# Altium PCB RGB_Matrix.PcbDoc
Units mm, origin at the board's own origin, x right, y up, seen from the top; angles counter-clockwise.
Board outline 66.5 x 59.5 mm, 2 copper layers (Top Layer, Bottom Layer); 83 components, 50 nets, 482 pads, 123 vias.
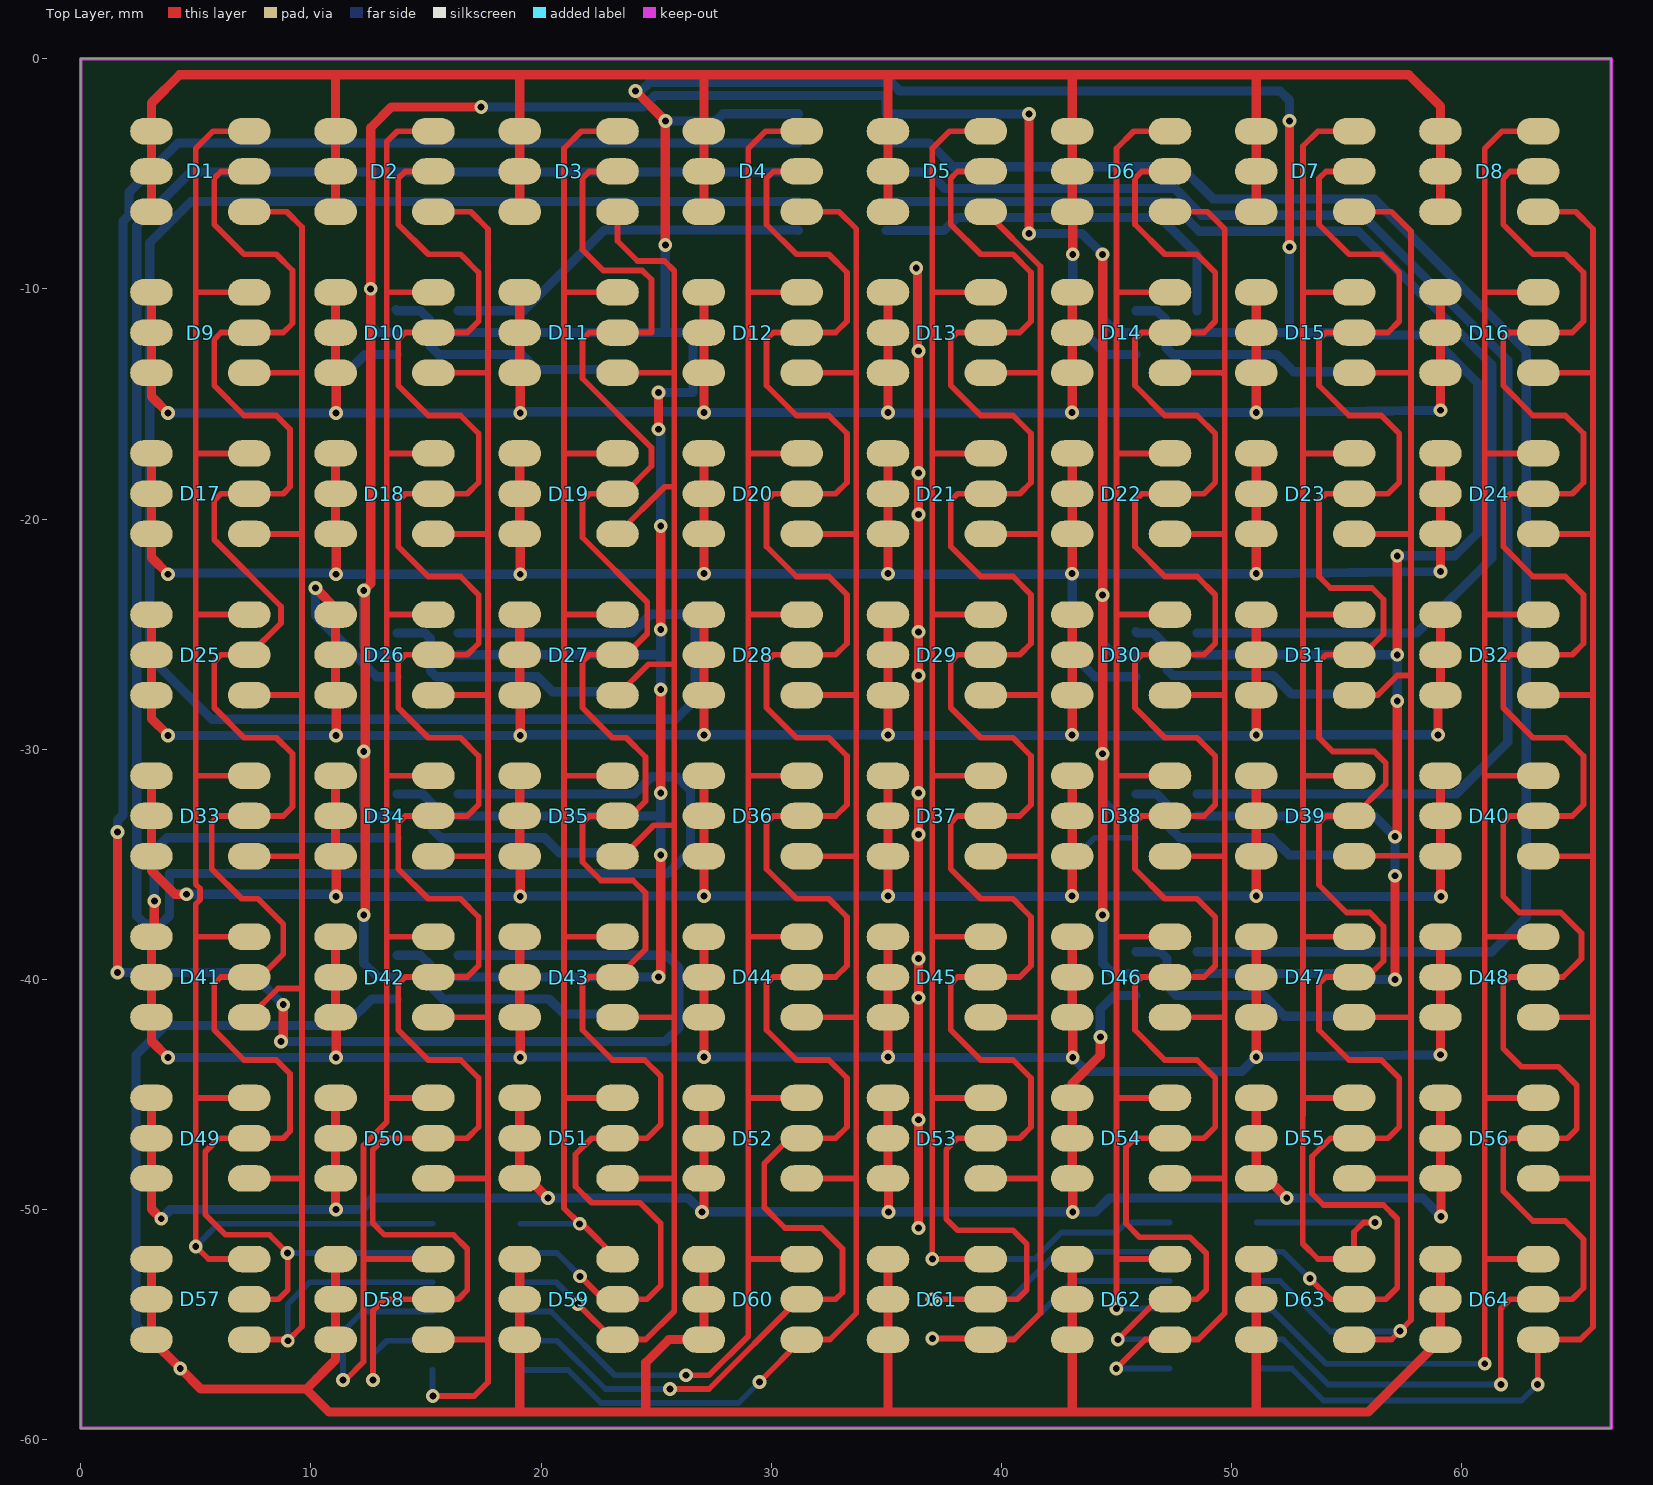
[diagram p0: Top Layer view]
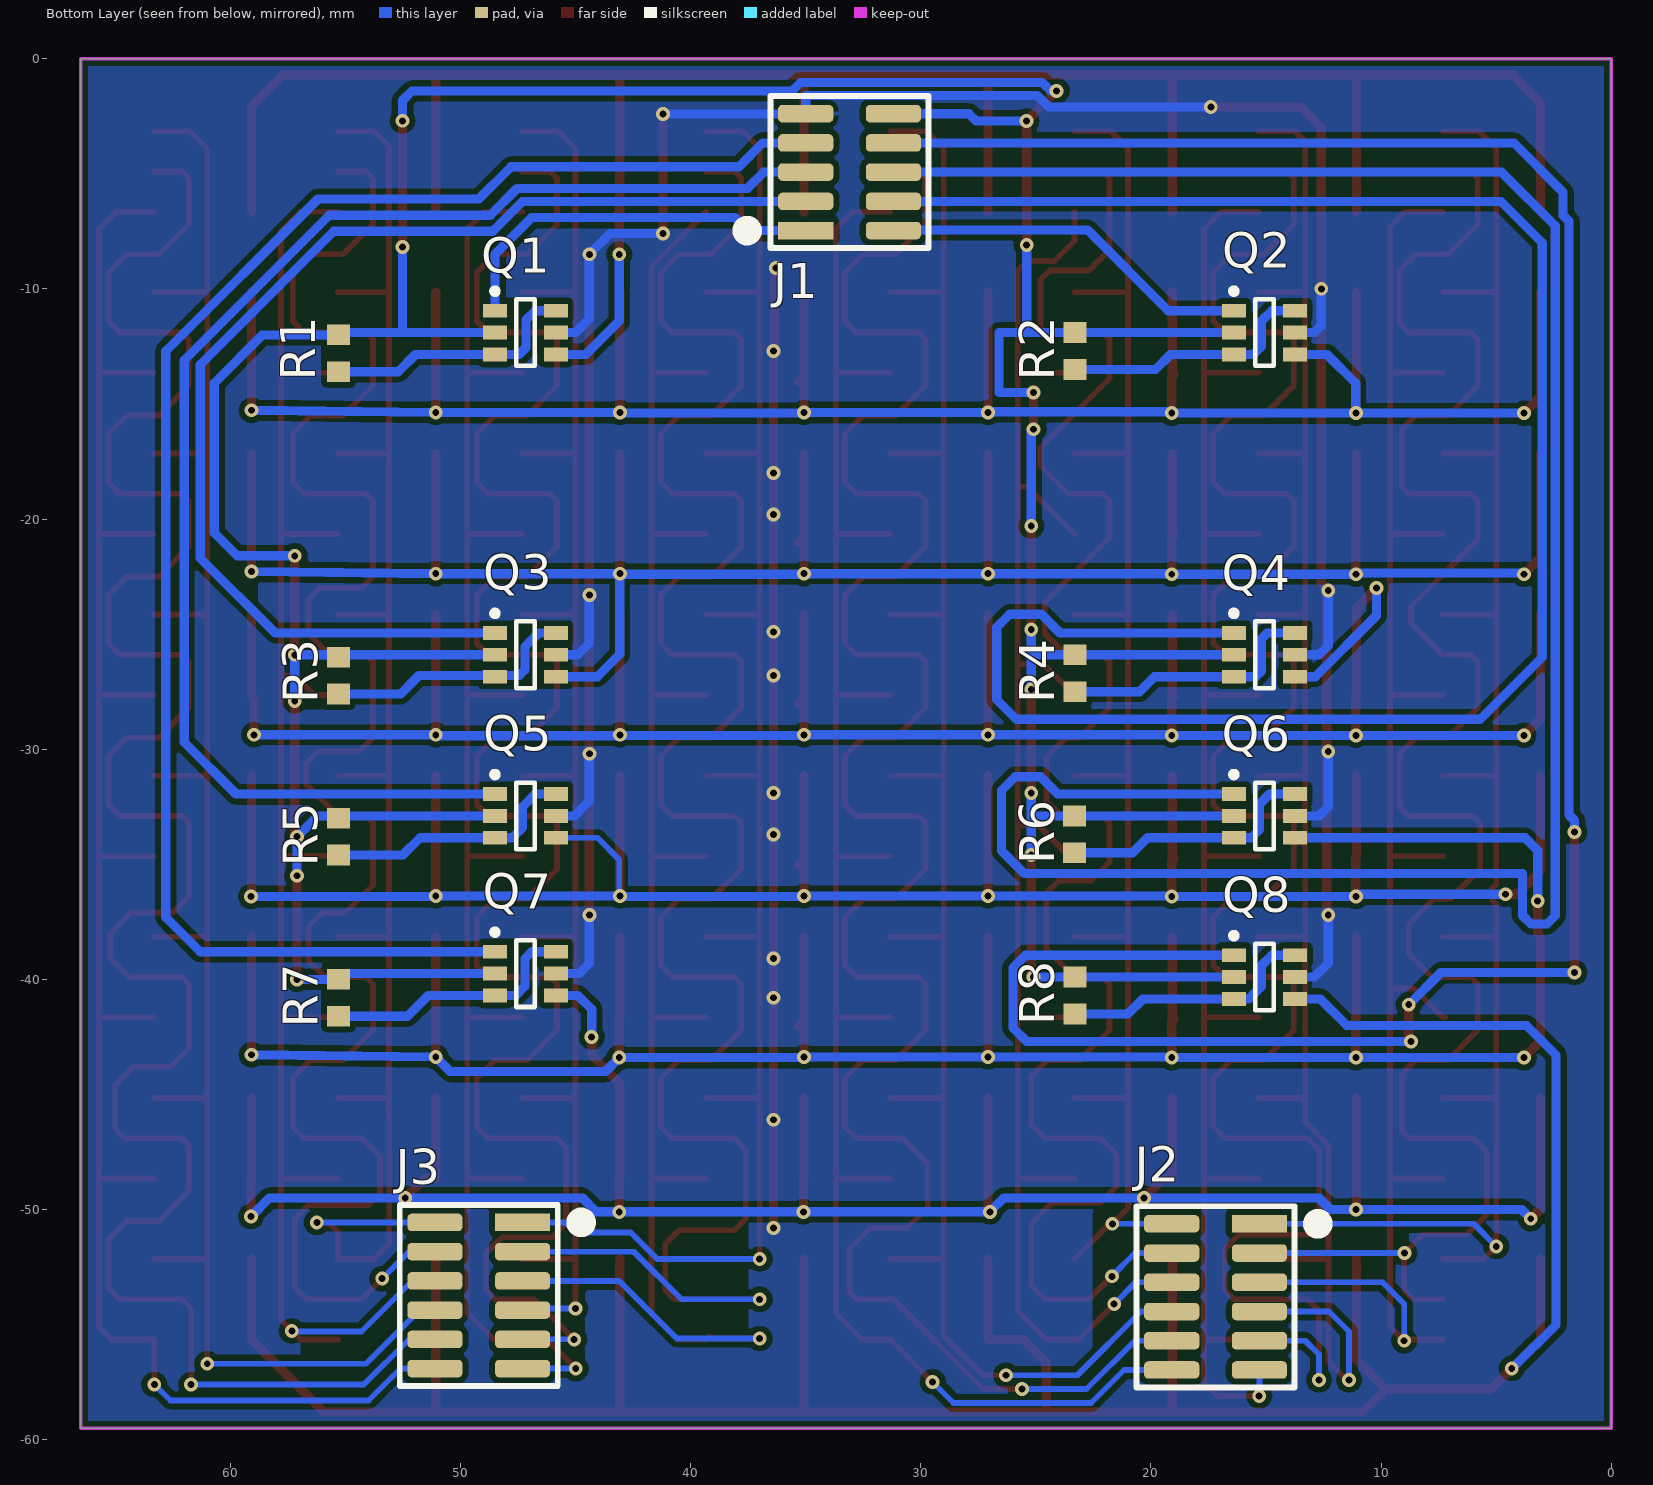
[diagram p1: Bottom Layer view, seen from below]
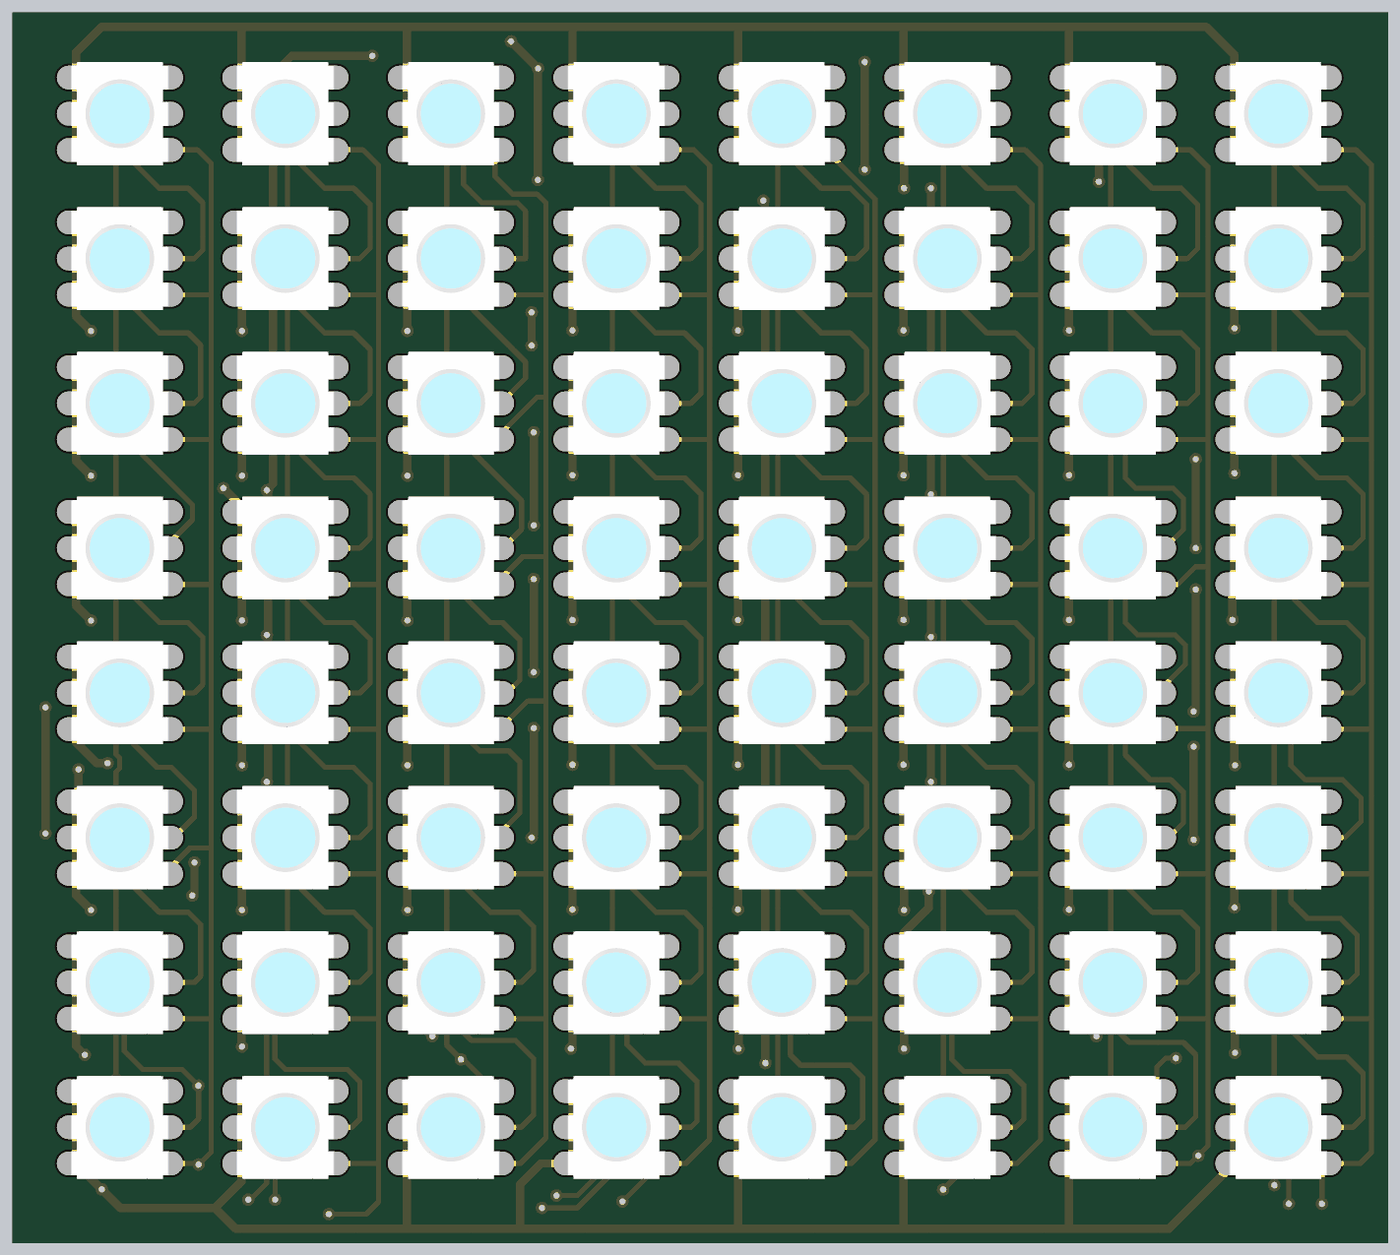
[diagram p2: 3D render of the assembled board from above, using the file's embedded part models]

## Layer stack, top to bottom
Top Solder: solder mask 0.0102, Solder Resist, Dk 3.5
Top Layer: signal copper 0.0356
Dielectric 1: dielectric 0.32, FR-4, Dk 4.8
Bottom Layer: signal copper 0.0356
Bottom Solder: solder mask 0.0102, Solder Resist, Dk 3.5

## Board outline
0,-59.5 66.5,-59.5 66.5,0 0,0

## Design rules (kind name [scope] priority, off if disabled: settings)
Clearance [All] p1: gap=0.16 ignorepadtopadclearanceinfootprint=FALSE except(0: Arc-Text Arc-Hole Track-Text Track-Hole SMDPad-Text SMDPad-Hole THPad-Text THPad-Hole Via-Text Via-Hole Fill-Text Fill-Hole Poly-Text Poly-Hole Region-Text Region-Hole Text-Text Text-Hole; 0.25: Arc-Poly Track-Poly SMDPad-Poly THPad-Poly Via-Poly Fill-Poly Poly-Poly)
Height [All] p1: minheight=0 maxheight=200 prefheight=12.7
HoleSize [All] p1: absolutevalues=TRUE maxlimit=6.35 minlimit=0.3 maxpercent=80.000 minpercent=20.000
MinimumSolderMaskSliver [All] p1: minsoldermaskwidth=0.1
PlaneClearance [All] p1: clearance=1
PlaneConnect [All] p1: planeconnectstyle=Relief reliefexpansion=0.508 reliefentries=4 reliefconductorwidth=1 reliefairgap=0.254
PolygonConnect PolygonConnect_1 [IsVia] p1: connectstyle=Direct reliefconductorwidth=0.254 reliefentries=4 polygonreliefangle="90 Angle" airgapwidth=0.254
PolygonConnect [All] p2: connectstyle=Relief reliefconductorwidth=0.2 reliefentries=4 polygonreliefangle="90 Angle" airgapwidth=0.2
RoutingVias [All] p1: holewidth=0.3 width=0.6 viastyle="Through Hole" minholewidth=0.3 minwidth=0.6 maxholewidth=6.35 maxwidth=10
SilkToSolderMaskClearance [IsPad] p1: minsilkscreentomaskgap=0.178 clearancetoexposedcopper=TRUE
SolderMaskExpansion [All] p1: expansion=0.102
Width [All] p1: maxlimit=10 minlimit=0.16 preferedwidth=0.4
24 further rules are at their usual default settings.

## Components (designator, comment, footprint, x,y, rotation, side; value= is the part's Value field where it differs from the comment)
D1 "LED_RGB" LED5050_RGB_N 5.2,-4.9 r0 top
D2 "LED_RGB" LED5050_RGB_N 13.2,-4.9 r0 top
D3 "LED_RGB" LED5050_RGB_N 21.2,-4.9 r0 top
D4 "LED_RGB" LED5050_RGB_N 29.2,-4.9 r0 top
D5 "LED_RGB" LED5050_RGB_N 37.2,-4.9 r0 top
D6 "LED_RGB" LED5050_RGB_N 45.2,-4.9 r0 top
D7 "LED_RGB" LED5050_RGB_N 53.2,-4.9 r0 top
D8 "LED_RGB" LED5050_RGB_N 61.2,-4.9 r0 top
D9 "LED_RGB" LED5050_RGB_N 5.2,-11.9 r0 top
D10 "LED_RGB" LED5050_RGB_N 13.2,-11.9 r0 top
D11 "LED_RGB" LED5050_RGB_N 21.2,-11.9 r0 top
D12 "LED_RGB" LED5050_RGB_N 29.2,-11.9 r0 top
D13 "LED_RGB" LED5050_RGB_N 37.2,-11.9 r0 top
D14 "LED_RGB" LED5050_RGB_N 45.2,-11.9 r0 top
D15 "LED_RGB" LED5050_RGB_N 53.2,-11.9 r0 top
D16 "LED_RGB" LED5050_RGB_N 61.2,-11.9 r0 top
D17 "LED_RGB" LED5050_RGB_N 5.2,-18.9 r0 top
D18 "LED_RGB" LED5050_RGB_N 13.2,-18.9 r0 top
D19 "LED_RGB" LED5050_RGB_N 21.2,-18.9 r0 top
D20 "LED_RGB" LED5050_RGB_N 29.2,-18.9 r0 top
D21 "LED_RGB" LED5050_RGB_N 37.2,-18.9 r0 top
D22 "LED_RGB" LED5050_RGB_N 45.2,-18.9 r0 top
D23 "LED_RGB" LED5050_RGB_N 53.2,-18.9 r0 top
D24 "LED_RGB" LED5050_RGB_N 61.2,-18.9 r0 top
D25 "LED_RGB" LED5050_RGB_N 5.2,-25.9 r0 top
D26 "LED_RGB" LED5050_RGB_N 13.2,-25.9 r0 top
D27 "LED_RGB" LED5050_RGB_N 21.2,-25.9 r0 top
D28 "LED_RGB" LED5050_RGB_N 29.2,-25.9 r0 top
D29 "LED_RGB" LED5050_RGB_N 37.2,-25.9 r0 top
D30 "LED_RGB" LED5050_RGB_N 45.2,-25.9 r0 top
D31 "LED_RGB" LED5050_RGB_N 53.2,-25.9 r0 top
D32 "LED_RGB" LED5050_RGB_N 61.2,-25.9 r0 top
D33 "LED_RGB" LED5050_RGB_N 5.2,-32.9 r0 top
D34 "LED_RGB" LED5050_RGB_N 13.2,-32.9 r0 top
D35 "LED_RGB" LED5050_RGB_N 21.2,-32.9 r0 top
D36 "LED_RGB" LED5050_RGB_N 29.2,-32.9 r0 top
D37 "LED_RGB" LED5050_RGB_N 37.2,-32.9 r0 top
D38 "LED_RGB" LED5050_RGB_N 45.2,-32.9 r0 top
D39 "LED_RGB" LED5050_RGB_N 53.2,-32.9 r0 top
D40 "LED_RGB" LED5050_RGB_N 61.2,-32.9 r0 top
D41 "LED_RGB" LED5050_RGB_N 5.2,-39.9 r0 top
D42 "LED_RGB" LED5050_RGB_N 13.2,-39.9 r0 top
D43 "LED_RGB" LED5050_RGB_N 21.2,-39.9 r0 top
D44 "LED_RGB" LED5050_RGB_N 29.2,-39.9 r0 top
D45 "LED_RGB" LED5050_RGB_N 37.2,-39.9 r0 top
D46 "LED_RGB" LED5050_RGB_N 45.2,-39.9 r0 top
D47 "LED_RGB" LED5050_RGB_N 53.2,-39.9 r0 top
D48 "LED_RGB" LED5050_RGB_N 61.2,-39.9 r0 top
D49 "LED_RGB" LED5050_RGB_N 5.2,-46.9 r0 top
D50 "LED_RGB" LED5050_RGB_N 13.2,-46.9 r0 top
D51 "LED_RGB" LED5050_RGB_N 21.2,-46.9 r0 top
D52 "LED_RGB" LED5050_RGB_N 29.2,-46.9 r0 top
D53 "LED_RGB" LED5050_RGB_N 37.2,-46.9 r0 top
D54 "LED_RGB" LED5050_RGB_N 45.2,-46.9 r0 top
D55 "LED_RGB" LED5050_RGB_N 53.2,-46.9 r0 top
D56 "LED_RGB" LED5050_RGB_N 61.2,-46.9 r0 top
D57 "LED_RGB" LED5050_RGB_N 5.2,-53.9 r0 top
D58 "LED_RGB" LED5050_RGB_N 13.2,-53.9 r0 top
D59 "LED_RGB" LED5050_RGB_N 21.2,-53.9 r0 top
D60 "LED_RGB" LED5050_RGB_N 29.2,-53.9 r0 top
D61 "LED_RGB" LED5050_RGB_N 37.2,-53.9 r0 top
D62 "LED_RGB" LED5050_RGB_N 45.2,-53.9 r0 top
D63 "LED_RGB" LED5050_RGB_N 53.2,-53.9 r0 top
D64 "LED_RGB" LED5050_RGB_N 61.2,-53.9 r0 top
J1 "2x5 SMD HEADER" "2x5 SMD HEADER" 35,-7.47 r180 bottom
J2 "2x6 SMD HEADER" "2x6 SMD HEADER" 15.29,-50.62 r0 bottom locked
J3 "2x6 SMD HEADER" "2x6 SMD HEADER" 47.3,-50.56 r0 bottom locked
Q1 "QS6M3TR" QS6M3TR 47.175,-11.9 r180 bottom
Q2 "QS6M3TR" QS6M3TR 15.075,-11.9 r180 bottom
Q3 "QS6M3TR" QS6M3TR 47.175,-25.9 r180 bottom
Q4 "QS6M3TR" QS6M3TR 15.075,-25.9 r180 bottom
Q5 "QS6M3TR" QS6M3TR 47.175,-32.9 r180 bottom
Q6 "QS6M3TR" QS6M3TR 15.075,-32.9 r180 bottom
Q7 "QS6M3TR" QS6M3TR 47.175,-39.75 r180 bottom
Q8 "QS6M3TR" QS6M3TR 15.075,-39.9 r180 bottom
R1 "10k" RESC0603(1608)_N 55.3,-12.8 r90 bottom
R2 "10k" RESC0603(1608)_N 23.3,-12.7 r90 bottom
R3 "10k" RESC0603(1608)_N 55.3,-26.8 r90 bottom
R4 "10k" RESC0603(1608)_N 23.3,-26.7 r90 bottom
R5 "10k" RESC0603(1608)_N 55.3,-33.8 r90 bottom
R6 "10k" RESC0603(1608)_N 23.325,-33.7 r90 bottom
R7 "10k" RESC0603(1608)_N 55.3,-40.8 r90 bottom
R8 "10k" RESC0603(1608)_N 23.3,-40.7 r90 bottom

## Footprints (in the part's own frame and the unit in brackets; to place one, negate y for a bottom-side part, rotate by r counter-clockwise, add the part's x,y. Pads: shape width x height; smd on the part's side, far side on the other; paste and mask are expansions set on the pad)
"2x5 SMD HEADER" [mm]
  rect 2.4x0.76 smd: 1(0,0)
  rrect50% 2.4x0.76 smd: 2(3.81,0) 3(0,1.27) 4(3.81,1.27) 5(0,2.54) 6(3.81,2.54) 7(0,3.81) 8(3.81,3.81) 9(0,5.08) 10(3.81,5.08)
  silkscreen extent -2.68,-0.76 5.33,5.84
"2x6 SMD HEADER" [mm]
  rect 2.4x0.76 smd: 1(0,0)
  rrect50% 2.4x0.76 smd: 2(3.81,0) 3(0,1.27) 4(3.81,1.27) 5(0,2.54) 6(3.81,2.54) 7(0,3.81) 8(3.81,3.81) 9(0,5.08) 10(3.81,5.08) 11(0,6.35) 12(3.81,6.35)
  silkscreen extent -2.68,-0.76 5.33,7.11
LED5050_RGB_N [mm] "RGB LED SMD 5050, individual color channels, normal density"
  oval 1.85x1.15 smd: 1(-2.125,1.75) 2(-2.125,0) 3(-2.125,-1.75) 4(2.125,-1.75) 5(2.125,0) 6(2.125,1.75)
  body extent -2.37,-2.49 2.36,2.49, height 2.07
QS6M3TR [mm] "SOT23, 6-Leads, Body 2.90x2.80mm, Pitch 0.95mm, IPC Medium Density"
  rect 1.05x0.6 smd: 1(-1.325,0.95) 2(-1.325,0) 3(-1.325,-0.95) 4(1.325,-0.95) 5(1.325,0) 6(1.325,0.95)
  silkscreen extent -1.45,-1.45 0.4,1.92, body extent -1.4,-1.45 1.4,1.45, height 1
RESC0603(1608)_N [mm] "Chip Resistor, Body 1.6x0.8mm, IPC Medium Density"
  rect 0.9x1 smd: 1(-0.8,0) 2(0.8,0)
  body extent -0.85,-0.47 0.85,0.47, height 0.6

## Part data
D1 D2 D3 D4 D5 D6 D7 D8 D9 D10 D11 D12 D13 D14 D15 D16 D17 D18 D19 D20 D21 D22 D23 D24 D25 D26 D27 D28 D29 D30 D31 D32 D33 D34 D35 D36 D37 D38 D39 D40 D41 D42 D43 D44 D45 D46 D47 D48 D49 D50 D51 D52 D53 D54 D55 D56 D57 D58 D59 D60 D61 D62 D63 D64: library part 3348, "LED RGB, independent colors", antall=300, beskrivelse=SMD, dybde=0, hylle=6, id=3348, kolonne=0, lager_type=Fremlager, navn="LED RGB", pakke_opprettet="12/17/2015 2:22:54 AM", pakke_opprettet_av=924, pakketype=SMD, pris=1, rad=7, rom=OV, symbol_opprettet="12/17/2015 2:22:13 AM", symbol_opprettet_av=924
R1 R2 R3 R4 R5 R6 R7 R8: library part 2444, "0.1W 1% Thick film resistor", antall=90, dybde=72, hylle=6, id=2444, kolonne=0, lager_type=Fremlager, leverandor=Farnell, leverandor_varenr=2447230, navn=10k, nokkelord="Resistor Motstand", pakke_opprettet="08-Jul-14 9:15:30 PM", pakke_opprettet_av=815, pakketype=0603, pris=0, produsent=Multikomp, rad=-1, rom=OV, symbol_opprettet="08-Jul-14 9:16:33 PM", symbol_opprettet_av=815

## Via types
v1: diameter 0.6, hole 0.3, Top Layer to Bottom Layer, tented both sides, 123 vias

## Nets (pads, with @x,y where several pads share a name; then routed paths per layer and width w, separated by ;. In a path a pad name is that pad's centre, name@x,y a point inside that pad or via, vN(x,y) a via of type N, cw(c..) or ccw(c..) an arc to the next point about the centre after c; other vN are vias at no path point)
GND: J1.9 Q1.5 Q2.5 Q3.5 Q4.5 Q5.5 Q6.5 Q7.5 Q8.5 | length 174
  Top Layer w0.4: v1(12.3,-37.2) 12.36,-37.14 12.36,-30.16 v1(12.3,-30.1) 12.36,-30.04 12.36,-23.16 v1(12.3,-23.1) 12.6,-22.8 v1(12.6,-10) 12.6,-3 13.5,-2.1 v1(17.4,-2.1) ; v1(36.3,-9.1) 36.36,-9.1 36.36,-12.7 v1(36.4,-12.7) v1(36.4,-18) v1(36.4,-19.8) v1(36.4,-24.9) v1(36.4,-26.8) v1(36.4,-31.9) v1(36.4,-33.7) v1(36.4,-39.1) v1(36.4,-40.8) v1(36.4,-46.1) v1(36.4,-50.8) ; v1(41.2,-7.6) v1(41.2,-2.4) ; v1(44.4,-37.2) v1(44.4,-30.2) v1(44.4,-23.3) v1(44.4,-8.5)
  Bottom Layer w0.4: v1(12.3,-37.2) 12.3,-39.3 12.9,-39.9 Q8.5 ; v1(12.3,-30.1) 12.3,-32.5 12.7,-32.9 Q6.5 ; v1(12.3,-23.1) 12.3,-25.5 12.7,-25.9 Q4.5 ; v1(12.6,-10) 12.6,-11.6 12.9,-11.9 Q2.5 ; v1(17.4,-2.1) 24.447,-2.1 24.947,-1.6 35,-1.6 J1.9 35.01,-2.4 v1(41.2,-2.4) ; v1(41.2,-7.6) 43.5,-7.6 v1(44.4,-8.5) 44.4,-11.3 45,-11.9 Q1.5 ; v1(44.4,-37.2) 44.4,-39.3 44.85,-39.75 Q7.5 ; 44.4,-32.25 45.05,-32.9 Q5.5 ; 44.4,-32.1 v1(44.4,-30.2) ; v1(44.4,-23.3) 44.4,-25.4 44.9,-25.9 Q3.5
LEDS.BLUE_1: D1.4 D9.4 D17.4 D25.4 D33.4 D41.4 D49.4 D57.4 J2.5 | length 77.4
  Top Layer w0.25: D41.4@7.225,-41.65 D41.4 8.575,-40.4 9.615,-40.4 ; D57.4 8.85,-55.65 9,-55.8 v1(9,-55.7) 9.615,-55.085 9.615,-48.7 ; D49.4 9.565,-48.65 9.615,-48.7 ; D33.4 9.565,-34.65 9.615,-34.6 ; D17.4 8.95,-20.65 9.565,-20.65 9.615,-20.6 ; D9.4 9.565,-13.65 9.615,-13.7 ; D1.4 8.95,-6.65 9.615,-7.315 9.615,-13.7 ; 8.95,-27.65 D25.4 8.95,-27.65 ; 8.95,-27.65 9.565,-27.65 9.615,-27.6 ; 9.615,-48.7 9.615,-40.4 ; 9.615,-40.4 9.615,-34.6 ; 9.615,-34.6 9.615,-27.6 ; 9.615,-27.6 9.615,-20.6 ; 9.615,-20.6 9.615,-13.7
  Bottom Layer w0.25: v1(9,-55.7) 9,-54.1 9.94,-53.16 J2.5
LEDS.BLUE_2: D2.4 D10.4 D18.4 D26.4 D34.4 D42.4 D50.4 D58.4 J2.11 | length 78.2
  Top Layer w0.25: v1(15.3,-58.1) 17.1,-58.1 17.7,-57.5 17.7,-55.7 ; D58.4 17.65,-55.65 17.7,-55.7 ; D50.4 17.65,-48.65 17.7,-48.7 ; D34.4 17.65,-34.65 17.7,-34.7 ; D18.4 17.65,-20.65 17.7,-20.7 ; D2.4 16.95,-6.65 17.7,-7.4 17.7,-13.7 ; 16.95,-41.65 D42.4 16.95,-41.65 ; 16.95,-41.65 17.65,-41.65 17.7,-41.7 ; 16.95,-27.65 17.65,-27.65 17.7,-27.7 ; 16.95,-27.65 D26.4 16.95,-27.65 ; 16.95,-13.65 D10.4 16.95,-13.65 ; 16.95,-13.65 17.65,-13.65 17.7,-13.7 ; 17.7,-55.7 17.7,-48.7 ; 17.7,-48.7 17.7,-41.7 ; 17.7,-41.7 17.7,-34.7 ; 17.7,-34.7 17.7,-27.7 ; 17.7,-27.7 17.7,-20.7 ; 17.7,-20.7 17.7,-13.7
  Bottom Layer w0.25: J2.11 15.29,-58.09 v1(15.3,-58.1)
LEDS.BLUE_3: D3.4 D11.4 D19.4 D27.4 D35.4 D43.4 D51.4 D59.4 J2.6 | length 74.4
  Top Layer w0.25: v1(21.6,-54.1) 23.15,-55.65 D59.4 24.55,-55.65 25.785,-54.415 25.785,-48.6 ; D51.4 25.735,-48.65 25.785,-48.6 ; D43.4 24.95,-41.65 25.735,-41.65 25.785,-41.7 ; D35.4 23.55,-34.65 24.9,-33.3 25.785,-33.3 ; D27.4 24.665,-26.31 25.785,-26.31 ; D19.4 25.375,-18.6 25.785,-18.6 ; D11.4 25.75,-13.65 ; D3.4 23.325,-7.925 24.19,-8.79 25.365,-8.79 25.785,-9.21 25.785,-18.6 ; 25.785,-32.19 25.785,-33.3 ; 25.785,-32.19 25.785,-26.31 ; 25.785,-48.6 25.785,-41.7 ; 25.785,-41.7 25.785,-41.015 25.785,-33.3 ; 25.785,-26.31 25.785,-18.6
  Bottom Layer w0.25: J2.6 20.66,-53.16 v1(21.6,-54.1)
LEDS.BLUE_4: D4.4 D12.4 D20.4 D28.4 D36.4 D44.4 D52.4 D60.4 J2.12 | length 81
  Top Layer w0.25: v1(29.488,-57.488) D60.4 32.55,-55.65 33.7,-54.5 33.7,-48.7 ; D52.4 33.65,-48.65 33.7,-48.7 ; D44.4 32.95,-41.65 33.65,-41.65 33.7,-41.7 ; D36.4 32.95,-34.65 33.65,-34.65 33.7,-34.7 ; D28.4 33.65,-27.65 33.7,-27.6 ; D20.4 32.95,-20.65 33.65,-20.65 33.7,-20.7 ; D12.4 33.65,-13.65 33.7,-13.7 ; D4.4 32.95,-6.65 33.7,-7.4 33.7,-13.7 ; 33.7,-48.7 33.7,-41.7 ; 33.7,-41.7 33.7,-34.7 ; 33.7,-34.7 33.7,-27.6 ; 33.7,-27.6 33.7,-20.7 ; 33.7,-20.7 33.7,-13.7
  Bottom Layer w0.25: J2.12 21.17,-56.97 22.6,-58.4 28.575,-58.4 v1(29.488,-57.488)
LEDS.BLUE_5: D5.4 D13.4 D21.4 D29.4 D37.4 D45.4 D53.4 D61.4 J3.5 | length 79.8
  Top Layer w0.25: v1(37,-55.6) 39.075,-55.6 39.175,-55.5 D61.4 40.55,-55.65 41.7,-54.5 41.7,-48.6 ; D53.4 41.65,-48.65 41.7,-48.6 ; D45.4 40.95,-41.65 41.65,-41.65 41.7,-41.7 ; D37.4 41.65,-34.65 41.7,-34.7 ; D29.4 41.65,-27.65 41.7,-27.7 ; D21.4 40.95,-20.65 41.65,-20.65 41.7,-20.6 ; D13.4 41.65,-13.65 41.7,-13.6 ; D5.4 41.7,-9.025 41.7,-13.6 ; 41.7,-48.6 41.7,-42.4 41.7,-41.7 ; 41.7,-41.7 41.7,-34.7 ; 41.7,-34.7 41.7,-27.7 ; 41.7,-27.7 41.7,-20.6 ; 41.7,-20.6 41.7,-13.6
  Bottom Layer w0.25: v1(37,-55.6) 40.6,-55.6 43.1,-53.1 J3.5
LEDS.BLUE_6: D6.4 D14.4 D22.4 D30.4 D38.4 D46.4 D54.4 D62.4 J3.11 | length 72.2
  Top Layer w0.25: v1(44.99,-56.91) 46.25,-55.65 D62.4 48.55,-55.65 49.7,-54.5 49.7,-48.7 ; D54.4 49.65,-48.65 49.7,-48.7 ; D46.4 48.95,-41.65 49.65,-41.65 49.7,-41.7 ; D38.4 49.65,-34.65 49.7,-34.7 ; D30.4 49.65,-27.65 49.7,-27.7 ; D22.4 48.95,-20.65 49.65,-20.65 49.7,-20.6 ; D14.4 49.6,-13.65 49.7,-13.75 ; D6.4 48.95,-6.65 49.7,-7.4 49.7,-13.75 ; 49.7,-48.7 49.7,-42.4 49.7,-41.7 ; 49.7,-41.7 49.7,-34.7 ; 49.7,-34.7 49.7,-27.7 ; 49.7,-27.7 49.7,-20.6 ; 49.7,-20.6 49.7,-13.75
  Bottom Layer w0.25: v1(44.99,-56.91) J3.11
LEDS.BLUE_7: D7.4 D15.4 D23.4 D31.4 D39.4 D47.4 D55.4 D63.4 J3.6 | length 75.3
  Top Layer w0.25: D63.4 56.95,-55.65 v1(57.325,-55.275) 57.8,-54.8 57.8,-48.7 ; D55.4 57.75,-48.65 57.8,-48.7 ; D47.4 56.95,-41.65 57.75,-41.65 57.8,-41.7 ; D39.4 55.345,-34.63 57.79,-34.63 ; D31.4 56.35,-27.65 57.2,-26.8 57.7,-26.8 ; D23.4 56.95,-20.65 57.75,-20.65 57.8,-20.7 ; D15.4 57.75,-13.65 57.8,-13.7 ; D7.4 56.95,-6.65 57.8,-7.5 57.8,-13.7 ; 57.79,-34.63 57.8,-34.62 57.8,-20.7 ; 57.79,-34.63 57.8,-34.64 57.8,-41.7 ; 57.8,-48.7 57.8,-41.7 ; 57.8,-20.7 57.8,-13.7
  Bottom Layer w0.25: J3.6 52.1,-53.1 54.3,-55.3 57.3,-55.3 v1(57.325,-55.275)
LEDS.BLUE_8: D8.4 D16.4 D24.4 D32.4 D40.4 D48.4 D56.4 D64.4 J3.12 | length 82.4
  Top Layer w0.25: v1(63.3,-57.6) 63.3,-55.675 D64.4 65.15,-55.65 65.7,-55.1 65.7,-48.6 ; D56.4 65.65,-48.65 65.7,-48.6 ; D48.4 64.95,-41.65 65.65,-41.65 65.7,-41.6 ; D40.4 64.95,-34.65 65.65,-34.65 65.7,-34.7 ; D32.4 65.65,-27.65 65.7,-27.6 ; D24.4 64.95,-20.65 65.65,-20.65 65.7,-20.7 ; D16.4 65.65,-13.65 65.7,-13.7 ; D8.4 64.95,-6.65 65.7,-7.4 65.7,-13.7 ; 65.7,-48.6 65.7,-41.6 ; 65.7,-41.6 65.7,-34.7 ; 65.7,-34.7 65.7,-27.6 ; 65.7,-27.6 65.7,-20.7 ; 65.7,-20.7 65.7,-13.7
  Bottom Layer w0.25: J3.12 52.61,-56.91 54,-58.3 62.6,-58.3 v1(63.3,-57.6)
LEDS.GREEN_1: D1.5 D9.5 D17.5 D25.5 D33.5 D41.5 D49.5 D57.5 J2.3 | length 88.8
  Top Layer w0.25: D41.5@7.225,-39.9 7.8,-39.9 8.8,-38.9 8.8,-37.6 7.7,-36.5 7,-36.5 5.7,-35.2 5.7,-33.2 6,-32.9 D33.5@7.225,-32.9 ; D57.5 8.6,-53.9 9,-53.5 9,-51.9 v1(8.99,-51.89) 8.2,-51.1 6.3,-51.1 5.41,-50.21 5.41,-47.49 6,-46.9 D49.5 8.8,-46.9 9.1,-46.6 9.1,-44.1 8.5,-43.5 7.1,-43.5 5.8,-42.2 5.8,-40.2 6.1,-39.9 D41.5 ; D33.5 8.8,-32.9 9.2,-32.5 9.2,-30.2 8.5,-29.5 7.1,-29.5 5.8,-28.2 5.8,-26.2 6.1,-25.9 D25.5 8.7,-24.525 8.7,-23.8 5.8,-20.9 5.8,-19.2 6.1,-18.9 D17.5 8.8,-18.9 9.1,-18.6 9.1,-16.1 8.5,-15.5 7.1,-15.5 5.8,-14.2 5.8,-12.2 6.1,-11.9 8.8,-11.9 9.2,-11.5 9.2,-9.2 8.5,-8.5 7.1,-8.5 5.8,-7.2 5.8,-5.2 6.1,-4.9 D1.5
  Bottom Layer w0.25: v1(8.99,-51.89) J2.3
LEDS.GREEN_2: D2.5 D10.5 D18.5 D26.5 D34.5 D42.5 D50.5 D58.5 J2.9 | length 97.6
  Top Layer w0.25: v1(12.7,-57.4) 12.7,-54.4 13.2,-53.9 D58.5 16.4,-53.9 16.8,-53.5 16.8,-51.7 16.2,-51.1 13.2,-51.1 12.695,-50.595 12.695,-47.405 13.2,-46.9 D50.5 16.8,-46.9 17.29,-46.41 17.29,-44.29 16.5,-43.5 15.1,-43.5 13.8,-42.2 13.8,-40.2 14.1,-39.9 D42.5 16.8,-39.9 17.29,-39.41 17.29,-37.29 16.5,-36.5 15.1,-36.5 13.8,-35.2 13.8,-33.2 14.1,-32.9 D34.5 16.8,-32.9 17.29,-32.41 17.29,-30.29 16.5,-29.5 15.1,-29.5 13.8,-28.2 13.8,-26.2 14.1,-25.9 D26.5 16.8,-25.9 17.29,-25.41 17.29,-23.29 16.5,-22.5 15.1,-22.5 13.8,-21.2 13.8,-19.2 14.1,-18.9 D18.5 16.8,-18.9 17.29,-18.41 17.29,-16.29 16.5,-15.5 15.1,-15.5 13.8,-14.2 13.8,-12.2 14.1,-11.9 D10.5 16.8,-11.9 17.29,-11.41 17.29,-9.29 16.5,-8.5 15.1,-8.5 13.8,-7.2 13.8,-5.2 14.1,-4.9 D2.5
  Bottom Layer w0.25: v1(12.7,-57.4) 12.7,-56.3 13.3,-55.7 J2.9
LEDS.GREEN_3: D3.5 D11.5 D19.5 D27.5 D35.5 D43.5 D51.5 D59.5 J2.4 | length 84
  Top Layer w0.25: v1(21.7,-52.9) 22.7,-53.9 D59.5 24.6,-53.9 25.2,-53.3 25.2,-50.6 24.3,-49.7 22.2,-49.7 21.5,-49 21.5,-47.6 22.2,-46.9 D51.5 24.6,-46.9 25.2,-46.3 25.2,-44.2 24.5,-43.5 23.1,-43.5 21.8,-42.2 21.8,-40.2 22.1,-39.9 D43.5 24.535,-38.69 24.535,-36.235 24,-35.7 22.6,-35.7 21.8,-34.9 21.8,-33.2 22.1,-32.9 D35.5 23.9,-32.9 24.535,-32.265 24.535,-30.335 23.7,-29.5 23.1,-29.5 21.8,-28.2 21.8,-26.2 22.1,-25.9 23.7,-25.9 24.615,-24.985 24.615,-23.615 21.8,-20.8 21.8,-19.2 22.1,-18.9 D19.5 23.6,-18.9 24.8,-17.7 24.8,-16.9 21.8,-13.9 21.8,-12.2 22.1,-11.9 24.8,-11.9 24.8,-9.6 24.4,-9.2 22.7,-9.2 21.8,-8.3 21.8,-5.2 22.1,-4.9 D3.5
  Bottom Layer w0.25: J2.4 20.69,-51.89 v1(21.7,-52.9)
LEDS.GREEN_4: D4.5 D12.5 D20.5 D28.5 D36.5 D44.5 D52.5 D60.5 J2.10 | length 100.4
  Top Layer w0.25: v1(25.6,-57.8) 27.3,-57.8 31.2,-53.9 D60.5 32.8,-53.9 33.1,-53.6 33.1,-51.7 32.2,-50.8 30.6,-50.8 29.7,-49.9 29.7,-48 30.8,-46.9 D52.5 32.8,-46.9 33.29,-46.41 33.29,-44.29 32.5,-43.5 31.1,-43.5 29.8,-42.2 29.8,-40.2 30.1,-39.9 D44.5 32.8,-39.9 33.29,-39.41 33.29,-37.29 32.5,-36.5 31.1,-36.5 29.8,-35.2 29.8,-33.2 30.1,-32.9 D36.5 32.8,-32.9 33.29,-32.41 33.29,-30.29 32.5,-29.5 31.1,-29.5 29.8,-28.2 29.8,-26.2 30.1,-25.9 32.8,-25.9 33.29,-25.41 33.29,-23.29 32.5,-22.5 31.1,-22.5 29.8,-21.2 29.8,-19.2 30.1,-18.9 D20.5 32.8,-18.9 33.29,-18.41 33.29,-16.29 32.5,-15.5 31.1,-15.5 29.8,-14.2 29.8,-12.2 30.1,-11.9 D12.5 32.8,-11.9 33.29,-11.41 33.29,-9.29 32.5,-8.5 31.1,-8.5 29.8,-7.2 29.8,-5.2 30.1,-4.9 D4.5
  Bottom Layer w0.25: J2.10 20.7,-55.7 22.8,-57.8 v1(25.6,-57.8)
LEDS.GREEN_5: D5.5 D13.5 D21.5 D29.5 D37.5 D45.5 D53.5 D61.5 J3.3 | length 100.1
  Top Layer w0.25: v1(37,-53.9) D61.5 40.7,-53.9 41.1,-53.5 41.1,-51.5 40.5,-50.9 38.1,-50.9 37.6,-50.4 37.6,-47.4 38.1,-46.9 D53.5 40.8,-46.9 41.29,-46.41 41.29,-44.29 40.5,-43.5 39.1,-43.5 37.8,-42.2 37.8,-40.2 38.1,-39.9 D45.5 40.8,-39.9 41.29,-39.41 41.29,-37.29 40.5,-36.5 39.1,-36.5 37.8,-35.2 37.8,-33.2 38.1,-32.9 D37.5 40.8,-32.9 41.29,-32.41 41.29,-30.29 40.5,-29.5 39.1,-29.5 37.8,-28.2 37.8,-26.2 38.1,-25.9 40.8,-25.9 41.29,-25.41 41.29,-23.29 40.5,-22.5 39.1,-22.5 37.8,-21.2 37.8,-19.2 38.1,-18.9 D21.5 40.8,-18.9 41.29,-18.41 41.29,-16.29 40.5,-15.5 39.1,-15.5 37.8,-14.2 37.8,-12.2 38.1,-11.9 D13.5 40.8,-11.9 41.29,-11.41 41.29,-9.29 40.5,-8.5 39.1,-8.5 37.8,-7.2 37.8,-5.2 38.1,-4.9 D5.5
  Bottom Layer w0.25: v1(37,-53.9) 40.4,-53.9 42.47,-51.83 J3.3
LEDS.GREEN_6: D6.5 D14.5 D22.5 D30.5 D38.5 D46.5 D54.5 D62.5 J3.9 | length 91.7
  Top Layer w0.25: v1(45.06,-55.64) 46.8,-53.9 D62.5 48.5,-53.9 48.9,-53.5 48.9,-51.9 48.2,-51.2 46,-51.2 45.41,-50.61 45.41,-47.29 45.8,-46.9 D54.5 48.8,-46.9 49.29,-46.41 49.29,-44.29 48.5,-43.5 47.1,-43.5 45.8,-42.2 45.8,-40.2 46.1,-39.9 D46.5 48.8,-39.9 49.29,-39.41 49.29,-37.29 48.5,-36.5 47.1,-36.5 45.8,-35.2 45.8,-33.2 46.1,-32.9 D38.5 48.8,-32.9 49.29,-32.41 49.29,-30.29 48.5,-29.5 47.1,-29.5 45.8,-28.2 45.8,-26.2 46.1,-25.9 48.8,-25.9 49.29,-25.41 49.29,-23.29 48.5,-22.5 47.1,-22.5 45.8,-21.2 45.8,-19.2 46.1,-18.9 D22.5 48.8,-18.9 49.29,-18.41 49.29,-16.29 48.5,-15.5 47.1,-15.5 45.8,-14.2 45.8,-12.2 46.1,-11.9 D14.5 48.8,-11.9 49.29,-11.41 49.29,-9.29 48.5,-8.5 47.1,-8.5 45.8,-7.2 45.8,-5.2 46.1,-4.9 D6.5
  Bottom Layer w0.25: v1(45.06,-55.64) J3.9
LEDS.GREEN_7: D7.5 D15.5 D23.5 D31.5 D39.5 D47.5 D55.5 D63.5 J3.4 | length 88.4
  Top Layer w0.25: v1(53.4,-53) 54.3,-53.9 D63.5 56.7,-53.9 57.2,-53.4 57.2,-50.4 56.6,-49.8 54,-49.8 53.5,-49.3 53.5,-47.7 54.3,-46.9 D55.5 56.8,-46.9 57.29,-46.41 57.29,-44.29 56.5,-43.5 55.1,-43.5 53.8,-42.2 53.8,-40.2 54.1,-39.9 D47.5 55.9,-39.9 56.6,-39.2 56.6,-37.7 56,-37.1 55,-37.1 53.8,-35.9 53.8,-33.2 54.1,-32.9 D39.5 56.7,-31.525 56.7,-30.6 56.2,-30.1 54.4,-30.1 53.8,-29.5 53.8,-26.2 54.1,-25.9 D31.5 55.7,-25.9 56.6,-25 56.6,-23.5 56.1,-23 54.3,-23 53.8,-22.5 53.8,-19.2 54.1,-18.9 D23.5 56.8,-18.9 57.29,-18.41 57.29,-16.29 56.5,-15.5 55.1,-15.5 53.8,-14.2 53.8,-12.2 54.1,-11.9 56.8,-11.9 57.29,-11.41 57.29,-9.29 56.5,-8.5 55.1,-8.5 53.8,-7.2 53.8,-5.2 54.1,-4.9 D7.5
  Bottom Layer w0.25: J3.4 52.23,-51.83 v1(53.4,-53)
LEDS.GREEN_8: D8.5 D16.5 D24.5 D32.5 D40.5 D48.5 D56.5 D64.5 J3.10 | length 102.2
  Top Layer w0.25: v1(61.7,-57.6) 61.7,-54.3 62.1,-53.9 64.8,-53.9 65.29,-53.41 65.29,-51.29 64.5,-50.5 63.1,-50.5 61.8,-49.2 61.8,-47.2 62.1,-46.9 D56.5 64.6,-46.9 65,-46.5 65,-44.6 64.2,-43.8 62.6,-43.8 61.8,-43 61.8,-40.2 62.1,-39.9 D48.5 64.4,-39.9 65.2,-39.1 65.2,-38 64.3,-37.1 62.5,-37.1 61.8,-36.4 61.8,-33.2 62.1,-32.9 D40.5 64.8,-32.9 65.29,-32.41 65.29,-30.29 64.5,-29.5 63.1,-29.5 61.8,-28.2 61.8,-26.2 62.1,-25.9 64.8,-25.9 65.29,-25.41 65.29,-23.29 64.5,-22.5 63.1,-22.5 61.8,-21.2 61.8,-19.2 62.1,-18.9 D24.5 64.8,-18.9 65.29,-18.41 65.29,-16.29 64.5,-15.5 63.1,-15.5 61.8,-14.2 61.8,-12.2 62.1,-11.9 64.8,-11.9 65.29,-11.41 65.29,-9.29 64.5,-8.5 63.1,-8.5 61.8,-7.2 61.8,-5.2 62.1,-4.9 D8.5
  Bottom Layer w0.25: J3.10 52.24,-55.64 54.2,-57.6 v1(61.7,-57.6)
LEDS.RED_1: D1.6 D9.6 D17.6 D25.6 D33.6 D41.6 D49.6 D57.6 J2.1 | length 79.2
  Top Layer w0.25: v1(5,-51.6) 5.55,-52.15 D57.6 ; v1@5,-51.5 5,-45.2 ; D49.6 5.05,-45.15 5,-45.2 ; D41.6 5.75,-38.15 5.05,-38.15 5,-38.1 ; D33.6 5.05,-31.15 5,-31.1 ; D17.6 5.05,-17.15 5,-17.2 ; D9.6 5.05,-10.15 5,-10.1 ; D1.6 5.75,-3.15 5,-3.9 5,-10.1 ; 5,-45.2 5,-38.1 ; 5,-38.1 5,-36.727 5.185,-36.542 5.185,-36.058 5,-35.873 5,-31.1 ; 5,-31.1 5,-24.1 ; 5,-24.1 5,-17.2 ; 5,-24.1 5.05,-24.15 5.85,-24.15 ; 5,-17.2 5,-10.1 ; 5.85,-24.15 D25.6 5.85,-24.15
  Bottom Layer w0.25: v1(5,-51.6) 5.98,-50.62 J2.1
LEDS.RED_2: D2.6 D10.6 D18.6 D26.6 D34.6 D42.6 D50.6 D58.6 J2.7 | length 80
  Top Layer w0.25: v1(11.4,-57.4) 11.5,-57.4 12.285,-56.615 12.285,-52.1 ; D58.6 12.335,-52.15 12.285,-52.1 ; D50.6 13.35,-45.15 13.3,-45.2 ; D34.6 13.35,-31.15 13.3,-31.2 ; D26.6 13.35,-24.15 13.3,-24.2 ; D18.6 13.35,-17.15 13.3,-17.1 ; D10.6 13.35,-10.15 13.3,-10.2 ; D2.6 13.75,-3.15 13.3,-3.6 13.3,-10.2 ; 12.285,-52.1 12.285,-47.215 13.3,-46.2 13.3,-45.2 ; 13.3,-45.2 13.3,-38.1 ; 13.3,-38.1 13.3,-31.2 ; 13.3,-38.1 13.35,-38.15 13.85,-38.15 ; 13.3,-31.2 13.3,-24.2 ; 13.3,-24.2 13.3,-17.1 ; 13.3,-17.1 13.3,-10.2 ; 13.85,-38.15 D42.6 13.85,-38.15
  Bottom Layer w0.25: v1(11.4,-57.4) 11.4,-55.3 12.27,-54.43 J2.7
LEDS.RED_3: D3.6 D11.6 D19.6 D27.6 D35.6 D43.6 D51.6 D59.6 J2.2 | length 68.6
  Top Layer w0.25: D59.6 21.795,-50.62 v1(21.68,-50.62) 21,-49.94 21,-49.5 21,-45.2 ; D51.6 21.05,-45.15 21,-45.2 ; D43.6 21.05,-38.15 21,-38.2 ; D35.6 21.05,-31.15 21,-31.2 ; D27.6 21.05,-24.15 21,-24.2 ; D19.6 21.05,-17.15 21,-17.2 ; D11.6 21.05,-10.15 21,-10.1 ; D3.6 21.75,-3.15 21,-3.9 21,-10.1 ; 21,-45.2 21,-38.9 21,-38.2 ; 21,-38.2 21,-31.2 ; 21,-31.2 21,-24.2 ; 21,-24.2 21,-17.2 ; 21,-17.2 21,-10.1
  Bottom Layer w0.25: J2.2 v1(21.68,-50.62)
LEDS.RED_4: D4.6 D12.6 D20.6 D28.6 D36.6 D44.6 D52.6 D60.6 J2.8 | length 82.4
  Top Layer w0.25: v1(26.3,-57.2) 27.3,-57.2 29,-55.5 29,-52.2 ; D60.6 29.05,-52.15 29,-52.2 ; D52.6 29.05,-45.15 29,-45.1 ; D44.6 29.05,-38.15 29,-38.2 ; D36.6 29.05,-31.15 29,-31.2 ; D28.6 29.05,-24.15 29,-24.2 ; D20.6 29.05,-17.15 29,-17.1 ; D12.6 29.05,-10.15 29,-10.1 ; D4.6 29.75,-3.15 29,-3.9 29,-10.1 ; 29,-52.2 29,-45.1 ; 29,-45.1 29,-38.2 ; 29,-38.2 29,-31.2 ; 29,-31.2 29,-24.2 ; 29,-24.2 29,-17.1 ; 29,-17.1 29,-10.1
  Bottom Layer w0.25: J2.8 20.43,-54.43 23.2,-57.2 v1(26.3,-57.2)
LEDS.RED_5: D5.6 D13.6 D21.6 D29.6 D37.6 D45.6 D53.6 D61.6 J3.1 | length 78.2
  Top Layer w0.25: D61.6 v1(37,-52.15) 37,-45.1 ; D53.6 37.05,-45.15 37,-45.1 ; D45.6 37.05,-38.15 37,-38.2 ; D37.6 37.05,-31.15 37,-31.1 ; D29.6 37.05,-24.15 37,-24.2 ; D21.6 37.05,-17.15 37,-17.1 ; D13.6 37.05,-10.15 37,-10.2 ; D5.6 37.75,-3.15 37,-3.9 37,-10.2 ; 37,-45.1 37,-38.9 37,-38.2 ; 37,-38.2 37,-31.1 ; 37,-31.1 37,-24.2 ; 37,-24.2 37,-17.1 ; 37,-17.1 37,-10.2
  Bottom Layer w0.25: v1(37,-52.15) 41.45,-52.15 42.6,-51 45,-51 45.44,-50.56 J3.1
LEDS.RED_6: D6.6 D14.6 D22.6 D30.6 D38.6 D46.6 D54.6 D62.6 J3.7 | length 71.8
  Top Layer w0.25: v1(45,-54.3) 45,-52.2 ; D62.6 45.05,-52.15 45,-52.2 ; D54.6 45.05,-45.15 45,-45.1 ; D46.6 45.05,-38.15 45,-38.2 ; D38.6 45,-31.15 ; D30.6 45.05,-24.15 45,-24.1 ; D22.6 45.05,-17.15 45,-17.2 ; D14.6 45.05,-10.15 45,-10.2 ; D6.6 45.75,-3.15 45,-3.9 45,-10.2 ; 45,-52.2 45,-45.1 ; 45,-45.1 45,-38.9 45,-38.2 ; 45,-38.2 45,-31.15 ; 45,-31.15 45,-24.1 ; 45,-24.1 45,-17.2 ; 45,-17.2 45,-10.2
  Bottom Layer w0.25: v1(45,-54.3) 47.23,-54.3 J3.7
LEDS.RED_7: D7.6 D15.6 D23.6 D31.6 D39.6 D47.6 D55.6 D63.6 J3.2 | length 76.5
  Top Layer w0.25: 53.85,-24.15 D31.6 53.15,-24.15 53.1,-24.2 ; 53.85,-10.15 D15.6 53.15,-10.15 53.1,-10.1 ; D55.6 53.15,-45.15 53.1,-45.2 ; D47.6 53.15,-38.15 53.1,-38.1 ; D39.6 53.1,-31.15 ; D23.6 53.15,-17.15 53.1,-17.1 ; D7.6 53.75,-3.15 53.1,-3.8 53.1,-10.1 ; v1(56.24,-50.56) 55.74,-50.56 55.325,-50.975 D63.6 53.75,-52.15 53.09,-51.49 53.09,-45.91 53.1,-45.9 53.1,-45.2 ; 53.1,-45.2 53.1,-38.1 ; 53.1,-38.1 53.1,-31.15 ; 53.1,-31.15 53.1,-24.2 ; 53.1,-24.2 53.1,-17.1 ; 53.1,-17.1 53.1,-10.1
  Bottom Layer w0.25: J3.2 v1(56.24,-50.56)
LEDS.RED_8: D8.6 D16.6 D24.6 D32.6 D40.6 D48.6 D56.6 D64.6 J3.8 | length 82.7
  Top Layer w0.25: v1(61,-56.7) 61,-52.1 ; D64.6 61.05,-52.15 61,-52.1 ; D56.6 61.05,-45.15 61,-45.1 ; D48.6 61.05,-38.15 61,-38.1 ; D40.6 61.05,-31.15 61,-31.1 ; D32.6 61.05,-24.15 61,-24.1 ; D24.6 61.05,-17.15 61,-17.2 ; D16.6 61.05,-10.15 61,-10.1 ; D8.6 61.75,-3.15 61,-3.9 61,-10.1 ; 61,-52.1 61,-51.3 61,-45.9 61,-45.1 ; 61,-45.1 61,-38.9 61,-38.1 ; 61,-38.1 61,-31.1 ; 61,-31.1 61,-24.1 ; 61,-24.1 61,-17.2 ; 61,-17.2 61,-10.1
  Bottom Layer w0.25: J3.8 51.77,-54.37 54.1,-56.7 v1(61,-56.7)
NetD1_1: D1.1 D1.2 D1.3 D2.1 D2.2 D2.3 D3.1 D3.2 D3.3 D4.1 D4.2 D4.3 D5.1 D5.2 D5.3 D6.1 D6.2 D6.3 D7.1 D7.2 D7.3 D8.1 D8.2 D8.3 Q1.4 | length 110.4
  Top Layer w0.4: D1.3 D1.2 D1.1 3.075,-1.925 4.3,-0.7 11.075,-0.7 ; D2.3 D2.2 D2.1 11.075,-0.7 ; D3.3 D3.2 D3.1 19.075,-0.775 19,-0.7 ; D4.3 D4.2 D4.1 27.075,-0.7 ; D5.3 D5.2 D5.1 35.075,-0.7 ; v1(43.1,-8.5) 43.1,-7.075 43.3,-6.875 D6.3 D6.2 D6.1 43.075,-0.7 ; D7.3 D7.2 D7.1 51.075,-0.7 ; D8.3 D8.2 D8.1 59.075,-2.075 57.7,-0.7 51.075,-0.7 ; 11.075,-0.7 19,-0.7 ; 19,-0.7 27.075,-0.7 ; 27.075,-0.7 35.075,-0.7 ; 35.075,-0.7 43.075,-0.7 ; 43.075,-0.7 51.075,-0.7
  Bottom Layer w0.4: v1(43.1,-8.5) 43.1,-11.4 44.55,-12.85 Q1.4
NetD9_1: D9.1 D9.2 D9.3 D10.1 D10.2 D10.3 D11.1 D11.2 D11.3 D12.1 D12.2 D12.3 D13.1 D13.2 D13.3 D14.1 D14.2 D14.3 D15.1 D15.2 D15.3 D16.1 D16.2 D16.3 Q2.4 | length 102.3
  Top Layer w0.4: D9.1 D9.2 D9.3 3.075,-14.675 v1(3.8,-15.4) ; D10.1 D10.2 D10.3 11.1,-13.675 v1(11.1,-15.4) ; D11.1 D11.3 19,-13.725 19.1,-13.825 v1(19.1,-15.4) ; v1(27.075,-15.375) D12.1 ; v1(35.075,-15.375) D13.3 D13.2 D13.1 ; D13.3@35.1,-13.8 D13.3@35.3,-14.025 ; v1(43.075,-15.375) D14.1 ; v1(51.075,-15.375) D15.3 D15.2 D15.1 ; v1(59.075,-15.275) D16.3 D16.2 D16.1
  Bottom Layer w0.4: v1(3.8,-15.4) v1(11.1,-15.4) ; Q2.4 12.35,-12.85 11.1,-14.1 v1(11.1,-15.4) ; v1(59.075,-15.275) v1(51.075,-15.375) v1(43.075,-15.375) 42.95,-15.4 35.1,-15.4 v1(35.075,-15.375) v1(27.075,-15.375) 27.04,-15.34 19.16,-15.34 v1(19.1,-15.4) v1(11.1,-15.4)
NetD17_1: D17.1 D17.2 D17.3 D18.1 D18.2 D18.3 D19.1 D19.2 D19.3 D20.1 D20.2 D20.3 D21.1 D21.2 D21.3 D22.1 D22.2 D22.3 D23.1 D23.2 D23.3 D24.1 D24.2 D24.3 Q3.4 | length 104.5
  Top Layer w0.4: D17.1 D17.2 D17.3 3.075,-21.675 v1(3.8,-22.4) ; D18.1 D18.2 D18.3 11.1,-20.675 v1(11.1,-22.4) ; D19.1 D19.3 19,-20.725 19.1,-20.825 v1(19.1,-22.4) ; v1(27.075,-22.375) D20.3 D20.2 D20.1 ; v1(35.075,-22.375) D21.3 D21.2 D21.1 ; D21.3@35.1,-20.8 D21.3@35.3,-21.025 ; v1(43.075,-22.375) D22.1 ; v1(51.075,-22.375) D23.3 D23.2 D23.1 ; v1(59.075,-22.275) D24.3 D24.2 D24.1
  Bottom Layer w0.4: v1(3.8,-22.4) 3.86,-22.34 11.04,-22.34 v1(11.1,-22.4) v1(19.1,-22.4) 19.125,-22.375 v1(27.075,-22.375) v1(35.075,-22.375) 35.1,-22.4 42.95,-22.4 v1(43.075,-22.375) ; Q3.4 44.05,-26.85 43.075,-25.875 v1(43.075,-22.375) ; v1(59.075,-22.275) v1(51.075,-22.375) v1(43.075,-22.375)
NetD25_1: D25.1 D25.2 D25.3 D26.1 D26.2 D26.3 D27.1 D27.2 D27.3 D28.1 D28.2 D28.3 D29.1 D29.2 D29.3 D30.1 D30.2 D30.3 D31.1 D31.2 D31.3 D32.1 D32.2 D32.3 Q4.4 | length 105.2
  Top Layer w0.4: D25.1 D25.2 D25.3 3.075,-28.675 v1(3.8,-29.4) ; v1(10.2,-23) 11.075,-23.875 D26.1 D26.2 D26.3 11.1,-27.675 v1(11.1,-29.4) ; D27.1 D27.3 19,-27.725 19.1,-27.825 v1(19.1,-29.4) ; v1(27.075,-29.375) D28.3 D28.2 D28.1 ; v1(35.075,-29.375) D29.3 D29.2 D29.1 ; D29.3@35.1,-27.8 D29.3@35.3,-28.025 ; v1(43.075,-29.375) D30.1 ; v1(51.075,-29.375) D31.3 D31.2 D31.1 ; v1(58.975,-29.375) 58.975,-27.75 D32.3 D32.2 D32.1
  Bottom Layer w0.4: v1(3.8,-29.4) v1(11.1,-29.4) v1(19.1,-29.4) 19.125,-29.375 v1(27.075,-29.375) v1(35.075,-29.375) 35.1,-29.4 42.95,-29.4 v1(43.075,-29.375) 43.12,-29.42 51.03,-29.42 v1(51.075,-29.375) v1(58.975,-29.375) ; v1(10.2,-23) 10.2,-24.192 12.858,-26.85 Q4.4
NetD33_1: D33.1 D33.2 D33.3 D34.1 D34.2 D34.3 D35.1 D35.2 D35.3 D36.1 D36.2 D36.3 D37.1 D37.2 D37.3 D38.1 D38.2 D38.3 D39.1 D39.2 D39.3 D40.1 D40.2 D40.3 Q5.4 | length 102.6
  Top Layer w0.4: D33.1 D33.2 D33.3 3.075,-35.275 4.1,-36.3 v1(4.6,-36.3) ; D34.1 D34.2 D34.3 11.1,-34.675 v1(11.1,-36.4) ; D35.1 D35.3 19,-34.725 19.1,-34.825 v1(19.1,-36.4) ; v1(27.075,-36.375) D36.3 D36.2 D36.1 ; v1(35.075,-36.375) D37.3 D37.2 D37.1 ; D37.3@35.1,-34.8 D37.3@35.3,-35.025 ; v1(43.075,-36.375) D38.1 ; v1(51.075,-36.375) D39.3 D39.2 D39.1 ; D40.1 D40.2 D40.3 59.075,-36.475 59.1,-36.45 v1(59.1,-36.4)
  Bottom Layer w0.25: v1@42.95,-36.4 43.1,-36.25 43.1,-34.8 44.05,-33.85 Q5.4
  Bottom Layer w0.4: v1(4.6,-36.3) 11,-36.3 v1(11.1,-36.4) v1(19.1,-36.4) 19.125,-36.375 v1(27.075,-36.375) v1(35.075,-36.375) 35.1,-36.4 42.95,-36.4 v1(43.075,-36.375) v1(51.075,-36.375) ; v1@51.075,-36.4 v1(59.1,-36.4)
NetD41_1: D41.1 D41.2 D41.3 D42.1 D42.2 D42.3 D43.1 D43.2 D43.3 D44.1 D44.2 D44.3 D45.1 D45.2 D45.3 D46.1 D46.2 D46.3 D47.1 D47.2 D47.3 D48.1 D48.2 D48.3 Q6.4 | length 112.9
  Top Layer w0.4: v1(3.2,-36.6) 3.2,-38.025 D41.1 D41.2 D41.3 3.075,-42.675 v1(3.8,-43.4) ; D42.1 D42.2 D42.3 11.1,-41.675 v1(11.1,-43.4) ; D43.1 D43.2 D43.3 19,-41.725 19.1,-41.825 v1(19.1,-43.4) ; v1(27.075,-43.375) D44.3 D44.2 D44.1 ; v1(35.075,-43.375) D45.3 D45.2 D45.1 ; D45.3@35.1,-41.8 D45.3@35.3,-42.025 ; D46.1 D46.2 D46.3 43.1,-41.675 v1(43.1,-43.4) ; v1(51.075,-43.375) D47.3 D47.2 D47.1 ; v1(59.075,-43.275) D48.3 D48.2 D48.1
  Bottom Layer w0.4: v1(3.2,-36.6) 3.2,-34.4 3.75,-33.85 Q6.4 ; v1(3.8,-43.4) v1(11.1,-43.4) v1(19.1,-43.4) 19.125,-43.375 v1(27.075,-43.375) v1(35.075,-43.375) 35.1,-43.4 v1(43.1,-43.4) 43.7,-44 50.45,-44 v1(51.075,-43.375) v1(59.075,-43.275)
NetD49_1: D49.1 D49.2 D49.3 D50.1 D50.2 D50.3 D51.1 D51.2 D51.3 D52.1 D52.2 D52.3 D53.1 D53.2 D53.3 D54.1 D54.2 D54.3 D55.1 D55.2 D55.3 D56.1 D56.2 D56.3 Q7.4 | length 103.6
  Top Layer w0.4: D49.1 D49.2 D49.3 3.075,-49.975 v1(3.5,-50.4) ; D50.1 D50.2 D50.3 11.075,-49.975 v1(11.1,-50) ; D51.1 D51.2 D51.3 19.45,-48.65 v1(20.3,-49.5) ; v1(27,-50.1) 27.075,-50.025 D52.3 D52.2 D52.1 ; D53.1 D53.2 D53.3 35.1,-48.675 v1(35.1,-50.1) ; v1(43.1,-50.1) 43.1,-48.675 D54.3 D54.2 D54.1 43.075,-44.525 44.3,-43.3 v1(44.3,-42.5) ; D55.1 D55.2 D55.3 51.55,-48.65 v1(52.4,-49.5) ; D56.1 D56.2 D56.3 59.1,-48.675 v1(59.1,-50.3)
  Bottom Layer w0.4: v1(3.5,-50.4) 3.9,-50 v1(11.1,-50) 12.2,-50 12.7,-49.5 v1(20.3,-49.5) 26.4,-49.5 v1(27,-50.1) v1(35.1,-50.1) v1(43.1,-50.1) 44.1,-50.1 44.7,-49.5 v1(52.4,-49.5) 58.3,-49.5 v1(59.1,-50.3) ; v1(44.3,-42.5) 44.3,-41.3 44.9,-40.7 Q7.4
NetD57_1: D57.1 D57.2 D57.3 D58.1 D58.2 D58.3 D59.1 D59.2 D59.3 D60.1 D60.2 D60.3 D61.1 D61.2 D61.3 D62.1 D62.2 D62.3 D63.1 D63.2 D63.3 D64.1 D64.2 D64.3 Q8.4 | length 134.4
  Top Layer w0.4: D57.1 D57.2 D57.3 v1(4.325,-56.9) 5.225,-57.8 9.8,-57.8 ; 10.25,-57.35 9.8,-57.8 ; D58.1 D58.2 D58.3 11.075,-56.525 9.8,-57.8 ; D59.1 D59.2 D59.3 19.075,-58.8 ; D60.1 D60.2 D60.3 25.55,-55.65 24.55,-56.65 24.55,-58.8 ; D61.1 D61.2 D61.3 35.075,-58.8 ; D62.1 D62.2 D62.3 43.075,-58.8 ; D63.1 D63.2 D63.3 51.075,-58.8 ; D64.1 D64.2 D64.3 55.925,-58.8 51.075,-58.8 ; 9.8,-57.8 10.8,-58.8 19.075,-58.8 ; 19.075,-58.8 24.55,-58.8 ; 24.55,-58.8 35.075,-58.8 ; 35.075,-58.8 43.075,-58.8 ; 43.075,-58.8 51.075,-58.8
  Bottom Layer w0.4: v1(4.325,-56.9) 4.3,-56.9 2.4,-55 2.4,-43.3 3.7,-42 11.5,-42 12.65,-40.85 Q8.4
NetQ1_3: Q1.3 Q1.6 R1.1 | length 11.3
  Bottom Layer w0.4: Q1.6 46.75,-10.95 47.15,-11.35 47.15,-12.55 47.45,-12.85 Q1.3 51.95,-12.85 52.7,-13.6 R1.1
NetQ2_3: Q2.3 Q2.6 R2.1 | length 11.3
  Bottom Layer w0.4: Q2.6@13.7,-10.9 Q2.6 14.75,-10.95 15.2,-11.4 15.2,-12.5 15.55,-12.85 Q2.3 19.15,-12.85 19.8,-13.5 R2.1
NetQ3_3: Q3.3 Q3.6 R3.1 | length 11.2
  Bottom Layer w0.4: Q3.6@45.85,-24.9 45.9,-24.95 46.6,-24.95 47.2,-25.55 47.2,-26.55 47.45,-26.8 51.8,-26.8 52.6,-27.6 R3.1
NetQ4_3: Q4.3 Q4.6 R4.1 | length 11.4
  Bottom Layer w0.4: Q4.6 14.95,-24.95 15.2,-25.2 15.2,-26.6 15.45,-26.85 Q4.3 19.85,-26.85 20.5,-27.5 R4.1
NetQ5_3: Q5.3 Q5.6 R5.1 | length 11.1
  Bottom Layer w0.4: Q5.6 46.75,-31.95 47.3,-32.5 47.3,-33.4 47.75,-33.85 Q5.3 51.75,-33.85 52.5,-34.6 R5.1
NetQ6_3: Q6.3 Q6.6 R6.1 | length 11.3
  Bottom Layer w0.4: Q6.6 14.85,-31.95 15.3,-32.4 15.3,-33.5 15.65,-33.85 Q6.3 20.15,-33.85 20.8,-34.5 R6.1
NetQ7_3: Q7.3 Q7.6 R7.1 | length 11.3
  Bottom Layer w0.4: Q7.6 46.9,-38.8 47.2,-39.1 47.2,-40.3 47.6,-40.7 Q7.3 51.4,-40.7 52.3,-41.6 R7.1
NetQ8_3: Q8.3 Q8.6 R8.1 | length 11.1
  Bottom Layer w0.4: Q8.6 14.75,-38.95 15.2,-39.4 15.2,-40.3 15.75,-40.85 Q8.3 20.35,-40.85 21,-41.5 R8.1
ROWS.ROW_1: J1.1 Q1.1 | length 16.8
  Bottom Layer w0.4: J1.1 37.5,-7.47 38.07,-6.9 46.9,-6.9 48.5,-8.5 Q1.1
ROWS.ROW_2: J1.2 Q2.1 | length 16.3
  Bottom Layer w0.4: Q2.1 19.25,-10.95 22.76,-7.44 31.16,-7.44 J1.2
ROWS.ROW_3: J1.3 Q3.1 | length 51.8
  Bottom Layer w0.4: J1.3 47.3,-6.2 48.6,-7.5 55.5,-7.5 61.3,-13.3 61.3,-21.7 58.05,-24.95 Q3.1
ROWS.ROW_4: J1.4 Q4.1 | length 86.1
  Bottom Layer w0.4: Q4.1 23.95,-24.95 24.76,-24.14 26.14,-24.14 26.7,-24.7 26.7,-27.849 25.849,-28.7 5.7,-28.7 3,-26 3,-8 4.8,-6.2 J1.4
ROWS.ROW_5: J1.5 Q5.1 | length 61.4
  Bottom Layer w0.4: J1.5 36.83,-4.93 37.54,-5.64 47.54,-5.64 48.7,-6.8 55.7,-6.8 62,-13.1 62,-29.7 59.75,-31.95 Q5.1
ROWS.ROW_6: J1.6 Q6.1 | length 99.6
  Bottom Layer w0.4: Q6.1 24.05,-31.95 24.8,-31.2 25.9,-31.2 26.5,-31.8 26.5,-34.4 25.5,-35.4 3.867,-35.4 3.86,-35.407 3.86,-37.223 3.483,-37.6 2.8,-37.6 2.44,-37.24 2.44,-7.26 4.77,-4.93 J1.6
ROWS.ROW_7: J1.7 Q7.1 | length 71.1
  Bottom Layer w0.4: J1.7 36.86,-3.66 37.9,-4.7 47.8,-4.7 49.2,-6.1 56.192,-6.1 62.8,-12.708 62.8,-37.3 61.3,-38.8 Q7.1
ROWS.ROW_8: J1.8 Q8.1 | length 103.5
  Top Layer w0.4: v1(1.6,-39.7) 1.6,-37.233 v1(1.6,-33.6) ; v1(8.7,-42.7) 8.8,-42.6 v1(8.8,-41.1)
  Bottom Layer w0.4: v1(1.6,-39.7) 7.4,-39.7 v1(8.8,-41.1) ; v1(1.6,-33.6) 1.6,-33.1 1.84,-32.86 1.84,-7.068 2.1,-6.808 2.1,-5.8 4.24,-3.66 J1.8 ; v1(8.7,-42.7) 9,-42.7 25.4,-42.7 26,-42.1 26,-39.5 25.45,-38.95 Q8.1
VCC: J1.10 Q1.2 Q2.2 Q3.2 Q4.2 Q5.2 Q6.2 Q7.2 Q8.2 R1.2 R2.2 R3.2 R4.2 R5.2 R6.2 R7.2 R8.2 | length 190.4
  Top Layer w0.4: v1(24.1,-1.4) v1(25.41,-2.71) 25.4,-2.72 v1(25.4,-8.1) ; v1(25.1,-39.9) 25.2,-39.8 v1(25.2,-34.6) ; v1(25.1,-16.1) v1(25.1,-14.5) ; v1@25.2,-31.9 v1(25.2,-27.4) ; v1(25.2,-24.8) v1(25.2,-20.3) ; v1(52.515,-8.185) v1(52.515,-2.7) ; v1(57.1,-40) v1(57.1,-35.5) ; v1(57.1,-33.8) 57.2,-33.7 v1(57.2,-27.9) ; v1(57.2,-25.9) v1(57.2,-21.6)
  Bottom Layer w0.4: Q8.2 v1(25.1,-39.9) ; Q6.2 R6.2 25.2,-32.9 v1(25.2,-34.6) ; Q4.2 R4.2 25.1,-25.9 25.2,-26 ; Q2.2 25.3,-11.9 ; v1(24.1,-1.4) 24.355,-1.4 24.715,-1.04 35.232,-1.04 35.56,-1.368 35.56,-1.4 52.1,-1.4 52.515,-1.815 v1(52.515,-2.7) ; v1(25.1,-16.1) 25.2,-16.2 v1(25.2,-20.3) ; v1(25.1,-14.5) 26.6,-14.5 26.6,-11.9 25.41,-11.9 25.4,-11.89 v1(25.4,-8.1) ; 25.2,-32.9 v1(25.2,-31.9) ; v1(25.2,-27.4) 25.2,-26 ; v1(25.2,-24.8) 25.2,-26 ; v1(25.41,-2.71) 27.59,-2.71 27.91,-2.39 J1.10 ; Q7.2 55.3,-39.75 R7.2 v1(57.1,-40) ; Q5.2 52.5,-32.9 ; Q3.2 52.515,-25.9 ; Q1.2 52.4,-11.9 ; 52.515,-32.9 56.2,-32.9 v1(57.1,-33.8) v1(57.1,-35.5) ; v1(52.515,-8.185) 52.515,-11.785 52.4,-11.9 ; 52.6,-25.9 56.2,-25.9 ; R1.2 58.6,-12 60.7,-14.1 60.7,-20.6 59.7,-21.6 v1(57.2,-21.6) ; R1.2@55.3,-11.9 52.4,-11.9 ; 56.2,-25.9 v1(57.2,-25.9) v1(57.2,-27.9)

## Polygon pours and split planes (outlines as drawn)
GND on Bottom Layer "Bottom Layer-No Net" (solid, remove dead copper, pour order 4): -3.2,2.8 -3.2,1.3 70.1,1.3 70.1,-62.5 -3.6,-62.5

## Keep-outs
Keep-Out Layer:
  the board outline again, w0.152

## Other copper
Bottom Layer:
  pour cut-out: 22.3,-49.9 22.537,-50.137 22.537,-55.997 21.997,-55.997 20.43,-54.43 20.9,-53.96 20.9,-49.9
  pour cut-out: 9.387,-52.287 9.387,-53.187 9.4,-53.2 9.822,-52.778 9.94,-52.778 9.94,-52.14 9.9,-52.1
  pour cut-out: 8.775,-51.372 8.8,-51.347 8.8,-50.8 9.4,-50.8 9.5,-50.9 9.396,-51.004 9.396,-51.508
  pour cut-out: 46.375,-27.405 47.975,-27.405 47.975,-26.3 46.6,-26.3
  pour cut-out: 55.8,-28.305 55.8,-28.285 56.741,-28.285 56.741,-27.597 56.055,-27.597
  pour cut-out: 56.053,-12.459 56.055,-12.459 56.055,-13.15 55.8,-13.15 55.8,-12.705
  pour cut-out: 37.5,-50.5 46.118,-50.5 46.118,-53.3 42.441,-53.3 42.441,-54.3 41.4,-54.3 41.4,-55.1 40.6,-55.1 40.6,-55.6 37.5,-55.6
  pour cut-out: 44.6,-53.5 46.118,-53.5 46.118,-57.307 44.593,-57.307
  pour cut-out: 56.945,-55.682 56.945,-56.4 56.3,-56.4 56.3,-55.5
  pour cut-out: 56.053,-40.459 56.055,-40.459 56.055,-41.141 54.545,-41.141 54.545,-40.336
  pour cut-out: 49.025,-38.245 45.9,-38.245 45.9,-39.3 48.2,-39.3
  pour cut-out: 48.3,-24.4 45.85,-24.4 45.85,-25.7 47.9,-25.7
  pour cut-out: 46.375,-31.395 47.975,-31.395 47.975,-32.9 48,-32.9
  pour cut-out: 47.3,-32.5 46.2,-32.5 46.2,-33.4 47.3,-33.4
  pour cut-out: 58.777,-22.738 58.777,-23.677 58.8,-23.7 59.558,-22.942 59.558,-22.758 59.472,-22.672
  pour cut-out: 46.375,-10.395 48.041,-10.395 48,-10.436 48,-12.3
  pour cut-out: 13.75,-11.8 14.8,-12.85 15.55,-12.85 15.55,-11.75 14.75,-10.95
  pour cut-out: 14,-32.4 14.1,-32.5 14.1,-33.4 14.441,-33.4 14.841,-33 14.841,-32.59 14.71,-32.59 14.536,-32.416
  pour cut-out: 14.479,-39.6 14.15,-39.6 13.75,-40 14.05,-40.3 15.2,-40.3 15.2,-39.4 14.75,-38.95